# Altium PCB qav90.PcbDoc (part 6 of 7)
Units mm, origin at the board's own origin, x right, y up, seen from the top; angles counter-clockwise.
Board outline 90 x 90 mm, 3 copper layers (Top Layer, Mid-Layer 1, Bottom Layer); 214 components, 77 nets, 727 pads, 256 vias.
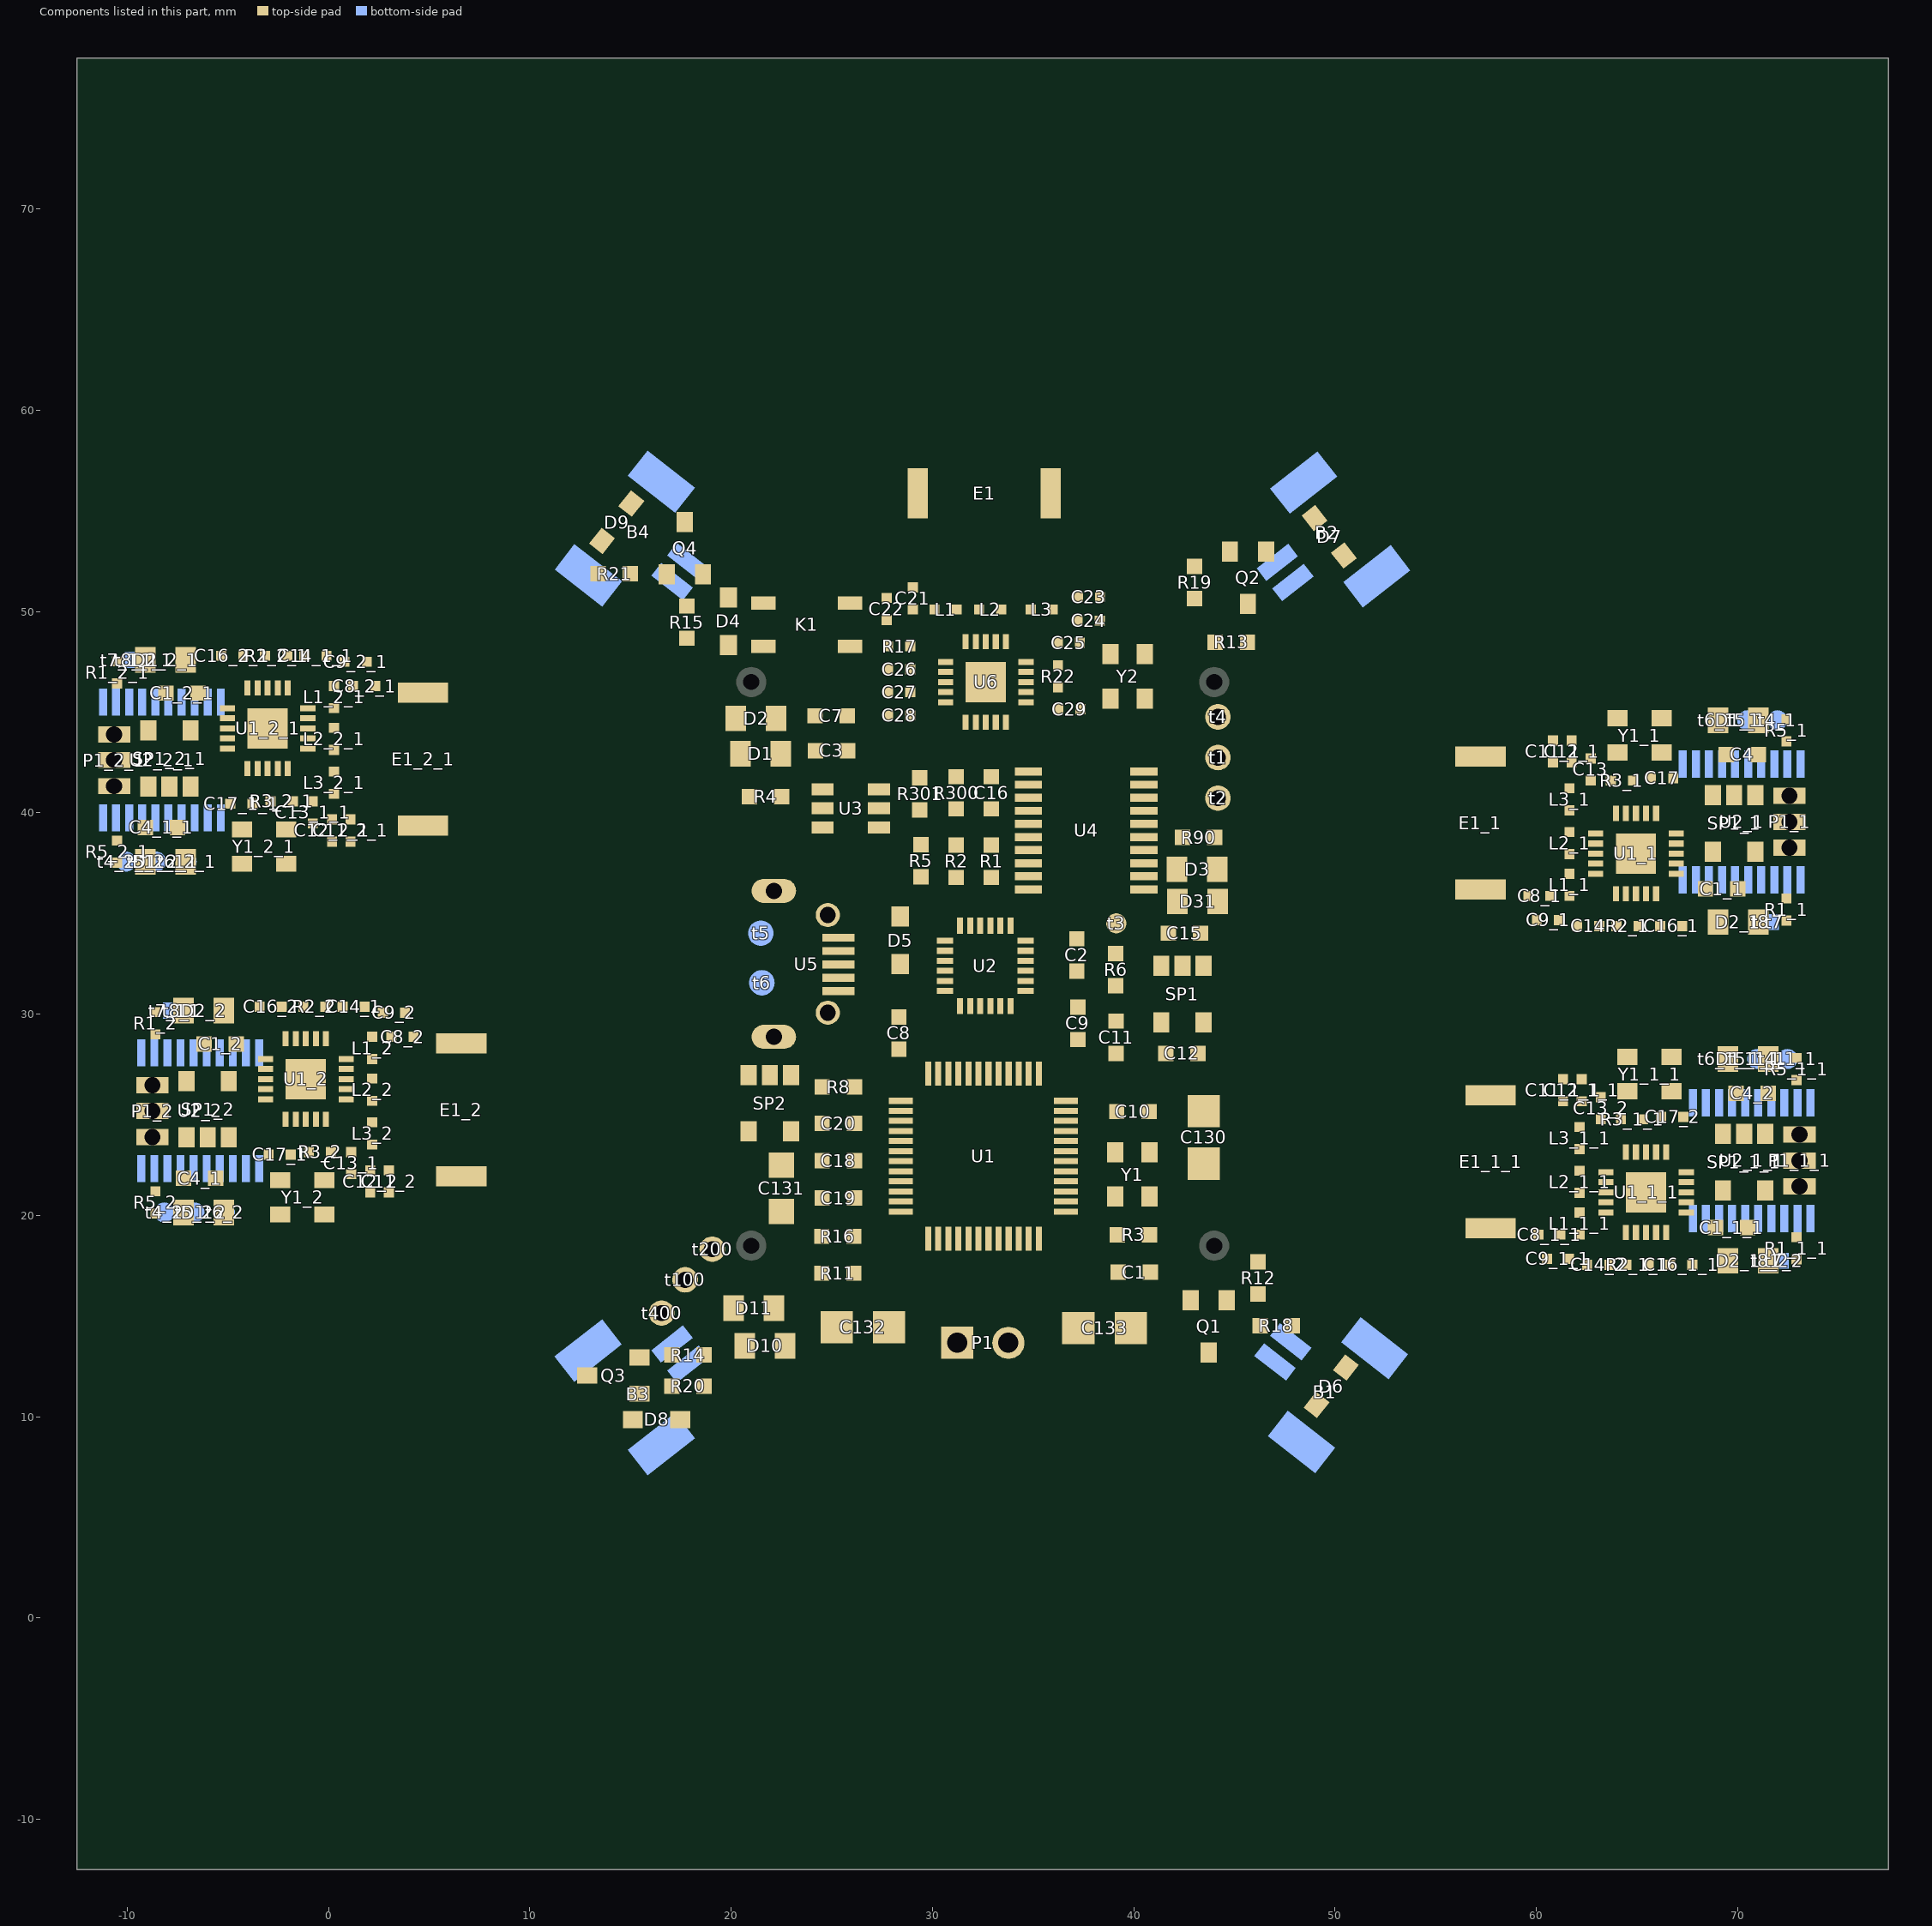
[diagram p6: the components of this part, seen from the top]

## Via types
v1: diameter 0.55, hole 0.25, Top Layer to Bottom Layer, tented both sides, 248 vias
v2: diameter 0.55, hole 0.25, Top Layer to Bottom Layer, 8 vias

## Nets (pads, with @x,y where several pads share a name; then routed paths per layer and width w, separated by ;. In a path a pad name is that pad's centre, name@x,y a point inside that pad or via, vN(x,y) a via of type N, cw(c..) or ccw(c..) an arc to the next point about the centre after c; other vN are vias at no path point) (continued)
copper on no net: (continued)
  Top Layer w0.508: -10.65,41.325 -10.65,38.775 -10.5,38.625 ; -10.5,46.421 -10.029,45.95 -8.25,45.95 ; v1(-9.281,43.173) -9.267,43.187 -8.363,43.187 v1(-7.875,43.675) -7.875,44.55 -6.475,45.95 -6.348,46.077 -6.348,46.581 ; -9.1,39.275 -9.1,39.362 -8.144,40.319 ; v1(-8.95,44.025) -8.95,45.25 -8.25,45.95 ; -8.75,23.9 -8.75,21.35 -8.6,21.2 ; -8.6,28.996 -8.129,28.525 -6.35,28.525 ; -8.075,45.95 -8.25,45.95 ; v1@-7.9,41.225 -8.144,40.981 ; v1(-7.381,25.748) -7.367,25.762 -6.463,25.762 v1(-5.975,26.25) -5.975,27.125 -4.575,28.525 -4.448,28.652 -4.448,29.156 ; -7.2,21.85 -7.2,21.937 -6.244,22.894 ; v1(-7.05,26.6) -7.05,27.825 -6.35,28.525 ; -6.175,28.525 -6.35,28.525 ; v1@-6,23.8 -6.244,23.556 ; v1(-5.375,38.425) -5.206,38.594 -5.206,39.743 -4.875,40.075 ; -4.875,40.45 -4.875,40.075 ; v1(-3.475,21) -3.306,21.169 -3.306,22.318 -2.975,22.65 ; -2.975,23.025 -2.975,22.65 ; -0.775,39.475 0.125,38.575 0.175,38.575 1.1,38.575 ; v1@-0.1,47.8 0.5,47.8 0.8,47.5 ; 0.275,42.05 0.275,43.125 ; 0.275,44.225 0.275,45.2 ; 0.275,46.3 1.225,46.3 ; 1.125,22.05 2.025,21.15 2.075,21.15 3,21.15 ; v1@1.8,30.375 2.4,30.375 2.7,30.075 ; 1.9,47.5 2.325,47.075 ; 2.175,24.625 2.175,25.7 ; 2.175,26.8 2.175,27.775 ; 2.175,28.875 3.125,28.875 ; 3.8,30.075 4.225,29.65 ; 4.75,45.975 4.425,46.3 2.325,46.3 2.325,47.075 ; 6.65,28.55 6.325,28.875 4.225,28.875 4.225,29.65 ; 57.175,36.2 57.5,35.875 59.6,35.875 59.6,35.1 ; 57.675,19.375 58,19.05 60.1,19.05 60.1,18.275 ; 60.025,34.675 59.6,35.1 ; 60.525,17.85 60.1,18.275 ; 60.7,35.875 61.65,35.875 ; 60.825,43.6 61.75,43.6 61.8,43.6 62.7,42.7 ; 61.125,34.675 61.425,34.375 v1@62.025,34.375 ; 61.2,19.05 62.15,19.05 ; 61.325,26.775 62.25,26.775 62.3,26.775 63.2,25.875 ; 61.625,17.85 61.925,17.55 v1@62.525,17.55 ; 61.65,36.975 61.65,37.95 ; 61.65,39.05 61.65,40.125 ; 62.15,20.15 62.15,21.125 ; 62.15,22.225 62.15,23.3 ; 66.8,41.725 66.8,42.1 ; 67.3,24.9 67.3,25.275 ; v1(67.3,43.75) 67.131,43.581 67.131,42.432 66.8,42.1 ; v1(67.8,26.925) 67.631,26.756 67.631,25.607 67.3,25.275 ; v1@69.825,40.95 70.069,41.194 ; 70,36.225 70.175,36.225 ; v1@70.325,24.125 70.569,24.369 ; 70.5,19.4 70.675,19.4 ; v1(70.875,38.15) 70.875,36.925 70.175,36.225 ; 71.025,42.9 71.025,42.813 70.069,41.856 ; v1(71.206,39.002) 71.192,38.988 70.288,38.988 v1(69.8,38.5) 69.8,37.625 68.4,36.225 68.273,36.098 68.273,35.594 ; v1(71.375,21.325) 71.375,20.1 70.675,19.4 ; 71.525,26.075 71.525,25.988 70.569,25.031 ; v1(71.706,22.177) 71.692,22.163 70.788,22.163 v1(70.3,21.675) 70.3,20.8 68.9,19.4 68.773,19.273 68.773,18.769 ; 72.425,35.754 71.954,36.225 70.175,36.225 ; 72.425,43.55 72.575,43.4 72.575,40.85 ; 72.925,18.929 72.454,19.4 70.675,19.4 ; 72.925,26.725 73.075,26.575 73.075,24.025 ; -10.65,38.978 ccw(c-10.148,38.978) -10.503,38.622 ; -10.65,38.978 ccw(c-10.148,38.978) -10.503,38.622 ; -10.65,38.978 ccw(c-10.148,38.978) -10.503,38.622 ; -8.973,39.275 cw(c-8.456,39.275) -8.822,39.641 ; -8.973,39.275 cw(c-8.456,39.275) -8.822,39.641 ; -8.973,39.275 cw(c-8.456,39.275) -8.822,39.641 ; -8.75,21.553 ccw(c-8.248,21.553) -8.603,21.197 ; -8.75,21.553 ccw(c-8.248,21.553) -8.603,21.197 ; -8.75,21.553 ccw(c-8.248,21.553) -8.603,21.197 ; -8.591,45.609 cw(c-8.075,45.094) -8.075,45.823 ; -8.591,45.609 cw(c-8.075,45.094) -8.075,45.823 ; -8.591,45.609 cw(c-8.075,45.094) -8.075,45.823 ; -8.144,40.319 cw(c-7.098,40.319) v1@-7.802,41.092 ; -8.144,40.319 cw(c-7.098,40.319) v1@-7.802,41.092 ; -8.144,40.319 cw(c-7.098,40.319) v1@-7.802,41.092 ; -8.144,40.319 -8.144,40.981 ; -8.144,40.636 cw(c-7.261,40.636) v1@-7.885,41.26 ; -8.144,40.636 cw(c-7.261,40.636) v1@-7.885,41.26 ; -8.144,40.636 cw(c-7.261,40.636) v1@-7.885,41.26 ; -8.144,40.981 cw(c-7.869,40.981) v1@-7.898,41.254 ; -8.144,40.981 cw(c-7.869,40.981) v1@-7.898,41.254 ; -8.144,40.981 cw(c-7.869,40.981) v1@-7.898,41.254 ; -8.059,40.691 ccw(c-8.445,40.939) v1@-8.032,41.137 ; -8.059,40.691 ccw(c-8.445,40.939) v1@-8.032,41.137 ; -8.059,40.691 ccw(c-8.445,40.939) v1@-8.032,41.137 ; -8.011,40.765 ccw(c-8.576,41.128) v1@-7.921,41.271 ; -8.011,40.765 ccw(c-8.576,41.128) v1@-7.921,41.271 ; -8.011,40.765 ccw(c-8.576,41.128) v1@-7.921,41.271 ; -8.011,40.765 ccw(c-8.576,41.128) v1@-7.921,41.271 ; -8.011,40.765 ccw(c-8.576,41.128) v1@-7.921,41.271 ; -8.011,40.765 ccw(c-8.576,41.128) v1@-7.921,41.271 ; -7.073,21.85 cw(c-6.556,21.85) -6.922,22.216 ; -7.073,21.85 cw(c-6.556,21.85) -6.922,22.216 ; -7.073,21.85 cw(c-6.556,21.85) -6.922,22.216 ; -6.691,28.184 cw(c-6.175,27.669) -6.175,28.398 ; -6.691,28.184 cw(c-6.175,27.669) -6.175,28.398 ; -6.691,28.184 cw(c-6.175,27.669) -6.175,28.398 ; -6.565,46.04 ccw(c-7.088,46.563) -6.348,46.563 ; -6.565,46.04 ccw(c-7.088,46.563) -6.348,46.563 ; -6.565,46.04 ccw(c-7.088,46.563) -6.348,46.563 ; -6.376,46.03 cw(c-6.057,46.29) -6.348,46.581 ; -6.376,46.03 cw(c-6.057,46.29) -6.348,46.581 ; -6.376,46.03 cw(c-6.057,46.29) -6.348,46.581 ; -6.348,46.581 -6.186,46.744 -6.186,47.964 v1(-6.1,48.05) -5.575,48.05 -5.325,47.8 ; -6.244,22.894 cw(c-5.198,22.894) v1@-5.902,23.667 ; -6.244,22.894 cw(c-5.198,22.894) v1@-5.902,23.667 ; -6.244,22.894 cw(c-5.198,22.894) v1@-5.902,23.667 ; -6.244,22.894 -6.244,23.556 ; -6.244,23.211 cw(c-5.361,23.211) v1@-5.985,23.835 ; -6.244,23.211 cw(c-5.361,23.211) v1@-5.985,23.835 ; -6.244,23.211 cw(c-5.361,23.211) v1@-5.985,23.835 ; -6.244,23.556 cw(c-5.969,23.556) v1@-5.998,23.829 ; -6.244,23.556 cw(c-5.969,23.556) v1@-5.998,23.829 ; -6.244,23.556 cw(c-5.969,23.556) v1@-5.998,23.829 ; -6.159,23.266 ccw(c-6.545,23.514) v1@-6.132,23.712 ; -6.159,23.266 ccw(c-6.545,23.514) v1@-6.132,23.712 ; -6.159,23.266 ccw(c-6.545,23.514) v1@-6.132,23.712 ; -6.111,23.34 ccw(c-6.676,23.703) v1@-6.021,23.846 ; -6.111,23.34 ccw(c-6.676,23.703) v1@-6.021,23.846 ; -6.111,23.34 ccw(c-6.676,23.703) v1@-6.021,23.846 ; -6.111,23.34 ccw(c-6.676,23.703) v1@-6.021,23.846 ; -6.111,23.34 ccw(c-6.676,23.703) v1@-6.021,23.846 ; -6.111,23.34 ccw(c-6.676,23.703) v1@-6.021,23.846 ; v1@-6.096,48.029 cw(c-5.922,47.203) -5.325,47.8 ; v1@-6.096,48.029 cw(c-5.922,47.203) -5.325,47.8 ; v1@-6.096,48.029 cw(c-5.922,47.203) -5.325,47.8 ; v1@-5.919,48.05 cw(c-5.919,47.206) -5.322,47.803 ; v1@-5.919,48.05 cw(c-5.919,47.206) -5.322,47.803 ; v1@-5.919,48.05 cw(c-5.919,47.206) -5.322,47.803 ; v1@-5.39,38.44 ccw(c-5.833,38.883) -5.206,38.883 ; v1@-5.39,38.44 ccw(c-5.833,38.883) -5.206,38.883 ; v1@-5.39,38.44 ccw(c-5.833,38.883) -5.206,38.883 ; -5.325,47.8 -5.325,47.746 -4.125,46.546 -4.125,45.4 ; -5.134,39.816 ccw(c-5.767,40.45) -4.871,40.45 ; -5.134,39.816 ccw(c-5.767,40.45) -4.871,40.45 ; -5.134,39.816 ccw(c-5.767,40.45) -4.871,40.45 ; -4.875,40.075 ccw(c-5.065,40.265) -4.872,40.453 ; -4.875,40.075 ccw(c-5.065,40.265) -4.872,40.453 ; -4.875,40.075 ccw(c-5.065,40.265) -4.872,40.453 ; -4.665,28.615 ccw(c-5.188,29.138) -4.448,29.138 ; -4.665,28.615 ccw(c-5.188,29.138) -4.448,29.138 ; -4.665,28.615 ccw(c-5.188,29.138) -4.448,29.138 ; -4.476,28.605 cw(c-4.157,28.865) -4.448,29.156 ; -4.476,28.605 cw(c-4.157,28.865) -4.448,29.156 ; -4.476,28.605 cw(c-4.157,28.865) -4.448,29.156 ; -4.448,29.156 -4.286,29.319 -4.286,30.539 v1(-4.2,30.625) -3.675,30.625 -3.425,30.375 ; v1@-4.196,30.604 cw(c-4.022,29.778) -3.425,30.375 ; v1@-4.196,30.604 cw(c-4.022,29.778) -3.425,30.375 ; v1@-4.196,30.604 cw(c-4.022,29.778) -3.425,30.375 ; -4.125,45.4 cw(c-5.031,44.494) -3.763,44.308 ; -4.125,45.4 ccw(c-3.03,46.495) -3.027,44.946 ; -4.125,45.4 cw(c-5.031,44.494) -3.763,44.308 ; -4.125,45.4 ccw(c-3.03,46.495) -3.027,44.946 ; -4.125,45.4 cw(c-5.031,44.494) -3.763,44.308 ; -4.125,45.4 ccw(c-3.03,46.495) -3.027,44.946 ; -4.125,45.4 -3.025,44.3 ; v1@-4.019,30.625 cw(c-4.019,29.781) -3.422,30.378 ; v1@-4.019,30.625 cw(c-4.019,29.781) -3.422,30.378 ; v1@-4.019,30.625 cw(c-4.019,29.781) -3.422,30.378 ; v1@-3.49,21.015 ccw(c-3.933,21.458) -3.306,21.458 ; v1@-3.49,21.015 ccw(c-3.933,21.458) -3.306,21.458 ; v1@-3.49,21.015 ccw(c-3.933,21.458) -3.306,21.458 ; -3.425,30.375 -3.425,30.321 -2.225,29.121 -2.225,27.975 ; v1@-3.333,43.819 ccw(c-3.554,44.3) -3.025,44.3 ; v1@-3.333,43.819 ccw(c-3.554,44.3) -3.025,44.3 ; v1@-3.333,43.819 ccw(c-3.554,44.3) -3.025,44.3 ; v1@-3.332,44.63 cw(c-3.48,44.2) -3.025,44.2 ; v1@-3.332,44.63 cw(c-3.48,44.2) -3.025,44.2 ; v1@-3.332,44.63 cw(c-3.48,44.2) -3.025,44.2 ; v1@-3.329,43.82 ccw(c-3.414,44.2) -3.025,44.2 ; v1@-3.329,43.82 ccw(c-3.414,44.2) -3.025,44.2 ; v1@-3.329,43.82 ccw(c-3.414,44.2) -3.025,44.2 ; v1@-3.327,44.629 cw(c-3.356,44.3) -3.025,44.3 ; v1@-3.327,44.629 cw(c-3.356,44.3) -3.025,44.3 ; v1@-3.327,44.629 cw(c-3.356,44.3) -3.025,44.3 ; -3.234,22.391 ccw(c-3.867,23.025) -2.971,23.025 ; -3.234,22.391 ccw(c-3.867,23.025) -2.971,23.025 ; -3.234,22.391 ccw(c-3.867,23.025) -2.971,23.025 ; -3.025,44.2 -3.025,44.3 ; -2.975,22.65 ccw(c-3.165,22.84) -2.972,23.028 ; -2.975,22.65 ccw(c-3.165,22.84) -2.972,23.028 ; -2.975,22.65 ccw(c-3.165,22.84) -2.972,23.028 ; -2.225,27.975 ccw(c-1.13,29.07) -1.127,27.521 ; -2.225,27.975 cw(c-3.131,27.069) -1.863,26.883 ; -2.225,27.975 ccw(c-1.13,29.07) -1.127,27.521 ; -2.225,27.975 cw(c-3.131,27.069) -1.863,26.883 ; -2.225,27.975 ccw(c-1.13,29.07) -1.127,27.521 ; -2.225,27.975 cw(c-3.131,27.069) -1.863,26.883 ; -2.225,27.975 -1.125,26.875 ; v1@-1.433,26.394 ccw(c-1.654,26.875) -1.125,26.875 ; v1@-1.433,26.394 ccw(c-1.654,26.875) -1.125,26.875 ; v1@-1.433,26.394 ccw(c-1.654,26.875) -1.125,26.875 ; v1@-1.432,27.205 cw(c-1.58,26.775) -1.125,26.775 ; v1@-1.432,27.205 cw(c-1.58,26.775) -1.125,26.775 ; v1@-1.432,27.205 cw(c-1.58,26.775) -1.125,26.775 ; v1@-1.429,26.395 ccw(c-1.514,26.775) -1.125,26.775 ; v1@-1.429,26.395 ccw(c-1.514,26.775) -1.125,26.775 ; v1@-1.429,26.395 ccw(c-1.514,26.775) -1.125,26.775 ; v1@-1.427,27.204 cw(c-1.456,26.875) -1.125,26.875 ; v1@-1.427,27.204 cw(c-1.456,26.875) -1.125,26.875 ; v1@-1.427,27.204 cw(c-1.456,26.875) -1.125,26.875 ; -1.125,26.775 -1.125,26.875 ; -0.748,39.448 cw(c-1.296,38.9) v1@-0.521,38.9 ; -0.748,39.448 cw(c-1.296,38.9) v1@-0.521,38.9 ; -0.748,39.448 cw(c-1.296,38.9) v1@-0.521,38.9 ; v1@-0.5,38.879 cw(c-0.5,38.104) 0.048,38.652 ; v1@-0.5,38.879 cw(c-0.5,38.104) 0.048,38.652 ; v1@-0.5,38.879 cw(c-0.5,38.104) 0.048,38.652 ; v1@-0.115,47.732 cw(c0.086,47.384) 0.19,47.772 ; v1@-0.115,47.732 cw(c0.086,47.384) 0.19,47.772 ; v1@-0.115,47.732 cw(c0.086,47.384) 0.19,47.772 ; v1@-0.115,47.732 cw(c0.086,47.384) 0.19,47.772 ; v1@-0.115,47.732 cw(c0.086,47.384) 0.19,47.772 ; v1@-0.115,47.732 cw(c0.086,47.384) 0.19,47.772 ; v1@0.085,47.8 cw(c0.085,46.785) 0.803,47.503 ; v1@0.085,47.8 cw(c0.085,46.785) 0.803,47.503 ; v1@0.085,47.8 cw(c0.085,46.785) 0.803,47.503 ; 0.376,47.8 cw(c0.376,47.344) 0.804,47.501 ; 0.376,47.8 cw(c0.376,47.344) 0.804,47.501 ; 0.376,47.8 cw(c0.376,47.344) 0.804,47.501 ; 1.152,22.023 cw(c0.604,21.475) v1@1.379,21.475 ; 1.152,22.023 cw(c0.604,21.475) v1@1.379,21.475 ; 1.152,22.023 cw(c0.604,21.475) v1@1.379,21.475 ; v1@1.4,21.454 cw(c1.4,20.679) 1.948,21.227 ; v1@1.4,21.454 cw(c1.4,20.679) 1.948,21.227 ; v1@1.4,21.454 cw(c1.4,20.679) 1.948,21.227 ; v1@1.785,30.307 cw(c1.986,29.959) 2.09,30.347 ; v1@1.785,30.307 cw(c1.986,29.959) 2.09,30.347 ; v1@1.785,30.307 cw(c1.986,29.959) 2.09,30.347 ; v1@1.785,30.307 cw(c1.986,29.959) 2.09,30.347 ; v1@1.785,30.307 cw(c1.986,29.959) 2.09,30.347 ; v1@1.785,30.307 cw(c1.986,29.959) 2.09,30.347 ; 1.9,47.504 cw(c1.896,47.075) 2.325,47.075 ; 1.9,47.504 cw(c1.896,47.075) 2.325,47.075 ; 1.9,47.504 cw(c1.896,47.075) 2.325,47.075 ; 1.903,47.503 cw(c0.884,46.484) 2.325,46.484 ; 1.903,47.503 cw(c0.884,46.484) 2.325,46.484 ; 1.903,47.503 cw(c0.884,46.484) 2.325,46.484 ; v1@1.985,30.375 cw(c1.985,29.36) 2.703,30.078 ; v1@1.985,30.375 cw(c1.985,29.36) 2.703,30.078 ; v1@1.985,30.375 cw(c1.985,29.36) 2.703,30.078 ; 2.276,30.375 cw(c2.276,29.919) 2.704,30.076 ; 2.276,30.375 cw(c2.276,29.919) 2.704,30.076 ; 2.276,30.375 cw(c2.276,29.919) 2.704,30.076 ; 2.621,46.3 cw(c2.621,44.596) 3.826,45.801 ; 2.621,46.3 cw(c2.621,44.596) 3.826,45.801 ; 2.621,46.3 cw(c2.621,44.596) 3.826,45.801 ; 3.181,46.173 ccw(c3.517,46.755) 3.87,46.184 ; 3.181,46.173 ccw(c3.517,46.755) 3.87,46.184 ; 3.181,46.173 ccw(c3.517,46.755) 3.87,46.184 ; 3.8,30.079 cw(c3.796,29.65) 4.225,29.65 ; 3.8,30.079 cw(c3.796,29.65) 4.225,29.65 ; 3.8,30.079 cw(c3.796,29.65) 4.225,29.65 ; 3.803,30.078 cw(c2.784,29.059) 4.225,29.059 ; 3.803,30.078 cw(c2.784,29.059) 4.225,29.059 ; 3.803,30.078 cw(c2.784,29.059) 4.225,29.059 ; 4.521,28.875 cw(c4.521,27.171) 5.726,28.376 ; 4.521,28.875 cw(c4.521,27.171) 5.726,28.376 ; 4.521,28.875 cw(c4.521,27.171) 5.726,28.376 ; 5.081,28.748 ccw(c5.417,29.33) 5.77,28.759 ; 5.081,28.748 ccw(c5.417,29.33) 5.77,28.759 ; 5.081,28.748 ccw(c5.417,29.33) 5.77,28.759 ; 58.055,35.991 cw(c58.408,35.42) 58.744,36.002 ; 58.055,35.991 cw(c58.408,35.42) 58.744,36.002 ; 58.055,35.991 cw(c58.408,35.42) 58.744,36.002 ; 58.099,36.374 ccw(c59.304,37.579) 59.304,35.875 ; 58.099,36.374 ccw(c59.304,37.579) 59.304,35.875 ; 58.099,36.374 ccw(c59.304,37.579) 59.304,35.875 ; 58.555,19.166 cw(c58.908,18.595) 59.244,19.177 ; 58.555,19.166 cw(c58.908,18.595) 59.244,19.177 ; 58.555,19.166 cw(c58.908,18.595) 59.244,19.177 ; 58.599,19.549 ccw(c59.804,20.754) 59.804,19.05 ; 58.599,19.549 ccw(c59.804,20.754) 59.804,19.05 ; 58.599,19.549 ccw(c59.804,20.754) 59.804,19.05 ; 59.6,35.1 ccw(c60.029,35.1) 60.025,34.671 ; 59.6,35.1 ccw(c60.029,35.1) 60.025,34.671 ; 59.6,35.1 ccw(c60.029,35.1) 60.025,34.671 ; 59.6,35.691 ccw(c61.041,35.691) 60.022,34.672 ; 59.6,35.691 ccw(c61.041,35.691) 60.022,34.672 ; 59.6,35.691 ccw(c61.041,35.691) 60.022,34.672 ; 60.1,18.275 ccw(c60.529,18.275) 60.525,17.846 ; 60.1,18.275 ccw(c60.529,18.275) 60.525,17.846 ; 60.1,18.275 ccw(c60.529,18.275) 60.525,17.846 ; 60.1,18.866 ccw(c61.541,18.866) 60.522,17.847 ; 60.1,18.866 ccw(c61.541,18.866) 60.522,17.847 ; 60.1,18.866 ccw(c61.541,18.866) 60.522,17.847 ; 61.121,34.674 ccw(c61.549,34.831) 61.549,34.375 ; 61.121,34.674 ccw(c61.549,34.831) 61.549,34.375 ; 61.121,34.674 ccw(c61.549,34.831) 61.549,34.375 ; 61.122,34.672 ccw(c61.84,35.39) v1@61.84,34.375 ; 61.122,34.672 ccw(c61.84,35.39) v1@61.84,34.375 ; 61.122,34.672 ccw(c61.84,35.39) v1@61.84,34.375 ; 61.622,17.847 ccw(c62.34,18.565) v1@62.34,17.55 ; 61.622,17.847 ccw(c62.34,18.565) v1@62.34,17.55 ; 61.622,17.847 ccw(c62.34,18.565) v1@62.34,17.55 ; 61.621,17.849 ccw(c62.049,18.006) 62.049,17.55 ; 61.621,17.849 ccw(c62.049,18.006) 62.049,17.55 ; 61.621,17.849 ccw(c62.049,18.006) 62.049,17.55 ; 61.735,34.403 ccw(c61.839,34.791) v1@62.04,34.443 ; 61.735,34.403 ccw(c61.839,34.791) v1@62.04,34.443 ; 61.735,34.403 ccw(c61.839,34.791) v1@62.04,34.443 ; 61.735,34.403 ccw(c61.839,34.791) v1@62.04,34.443 ; 61.735,34.403 ccw(c61.839,34.791) v1@62.04,34.443 ; 61.735,34.403 ccw(c61.839,34.791) v1@62.04,34.443 ; 61.877,43.523 ccw(c62.425,44.071) v1@62.425,43.296 ; 61.877,43.523 ccw(c62.425,44.071) v1@62.425,43.296 ; 61.877,43.523 ccw(c62.425,44.071) v1@62.425,43.296 ; 62.235,17.578 ccw(c62.339,17.966) v1@62.54,17.618 ; 62.235,17.578 ccw(c62.339,17.966) v1@62.54,17.618 ; 62.235,17.578 ccw(c62.339,17.966) v1@62.54,17.618 ; 62.235,17.578 ccw(c62.339,17.966) v1@62.54,17.618 ; 62.235,17.578 ccw(c62.339,17.966) v1@62.54,17.618 ; 62.235,17.578 ccw(c62.339,17.966) v1@62.54,17.618 ; 62.377,26.698 ccw(c62.925,27.246) v1@62.925,26.471 ; 62.377,26.698 ccw(c62.925,27.246) v1@62.925,26.471 ; 62.377,26.698 ccw(c62.925,27.246) v1@62.925,26.471 ; v1@62.446,43.275 ccw(c63.221,43.275) 62.673,42.727 ; v1@62.446,43.275 ccw(c63.221,43.275) 62.673,42.727 ; v1@62.446,43.275 ccw(c63.221,43.275) 62.673,42.727 ; v1@62.946,26.45 ccw(c63.721,26.45) 63.173,25.902 ; v1@62.946,26.45 ccw(c63.721,26.45) 63.173,25.902 ; v1@62.946,26.45 ccw(c63.721,26.45) 63.173,25.902 ; 64.95,37.875 ccw(c65.281,37.875) v1@65.252,37.546 ; 64.95,37.875 cw(c65.479,37.875) v1@65.258,38.356 ; 64.95,37.875 ccw(c65.281,37.875) v1@65.252,37.546 ; 64.95,37.875 cw(c65.479,37.875) v1@65.258,38.356 ; 64.95,37.875 ccw(c65.281,37.875) v1@65.252,37.546 ; 64.95,37.875 cw(c65.479,37.875) v1@65.258,38.356 ; 64.95,37.875 64.95,37.975 ; 64.95,37.875 66.05,36.775 ; 64.95,37.975 ccw(c65.405,37.975) v1@65.257,37.545 ; 64.95,37.975 cw(c65.339,37.975) v1@65.254,38.355 ; 64.95,37.975 ccw(c65.405,37.975) v1@65.257,37.545 ; 64.95,37.975 cw(c65.339,37.975) v1@65.254,38.355 ; 64.95,37.975 ccw(c65.405,37.975) v1@65.257,37.545 ; 64.95,37.975 cw(c65.339,37.975) v1@65.254,38.355 ; 64.952,37.229 cw(c64.955,35.68) 66.05,36.775 ; 64.952,37.229 cw(c64.955,35.68) 66.05,36.775 ; 64.952,37.229 cw(c64.955,35.68) 66.05,36.775 ; 65.45,21.05 cw(c65.979,21.05) v1@65.758,21.531 ; 65.45,21.05 ccw(c65.781,21.05) v1@65.752,20.721 ; 65.45,21.05 cw(c65.979,21.05) v1@65.758,21.531 ; 65.45,21.05 ccw(c65.781,21.05) v1@65.752,20.721 ; 65.45,21.05 cw(c65.979,21.05) v1@65.758,21.531 ; 65.45,21.05 ccw(c65.781,21.05) v1@65.752,20.721 ; 65.45,21.05 66.55,19.95 ; 65.45,21.05 65.45,21.15 ; 65.45,21.15 cw(c65.839,21.15) v1@65.754,21.53 ; 65.45,21.15 ccw(c65.905,21.15) v1@65.757,20.72 ; 65.45,21.15 cw(c65.839,21.15) v1@65.754,21.53 ; 65.45,21.15 ccw(c65.905,21.15) v1@65.757,20.72 ; 65.45,21.15 cw(c65.839,21.15) v1@65.754,21.53 ; 65.45,21.15 ccw(c65.905,21.15) v1@65.757,20.72 ; 65.452,20.404 cw(c65.455,18.855) 66.55,19.95 ; 65.452,20.404 cw(c65.455,18.855) 66.55,19.95 ; 65.452,20.404 cw(c65.455,18.855) 66.55,19.95 ; 65.688,37.867 ccw(c66.956,37.681) 66.05,36.775 ; 65.688,37.867 ccw(c66.956,37.681) 66.05,36.775 ; 65.688,37.867 ccw(c66.956,37.681) 66.05,36.775 ; 66.05,36.775 66.05,35.629 67.25,34.429 67.25,34.375 ; 66.188,21.042 ccw(c67.456,20.856) 66.55,19.95 ; 66.188,21.042 ccw(c67.456,20.856) 66.55,19.95 ; 66.188,21.042 ccw(c67.456,20.856) 66.55,19.95 ; 66.55,19.95 66.55,18.804 67.75,17.604 67.75,17.55 ; 66.796,41.725 cw(c67.692,41.725) 67.059,42.359 ; 66.796,41.725 cw(c67.692,41.725) 67.059,42.359 ; 66.796,41.725 cw(c67.692,41.725) 67.059,42.359 ; 66.797,41.722 cw(c66.99,41.91) 66.8,42.1 ; 66.797,41.722 cw(c66.99,41.91) 66.8,42.1 ; 66.797,41.722 cw(c66.99,41.91) 66.8,42.1 ; 67.131,43.292 cw(c67.758,43.292) v1@67.315,43.735 ; 67.131,43.292 cw(c67.758,43.292) v1@67.315,43.735 ; 67.131,43.292 cw(c67.758,43.292) v1@67.315,43.735 ; 67.247,34.372 ccw(c67.844,34.969) v1@67.844,34.125 ; 67.247,34.372 ccw(c67.844,34.969) v1@67.844,34.125 ; 67.247,34.372 ccw(c67.844,34.969) v1@67.844,34.125 ; 67.25,34.375 ccw(c67.847,34.972) v1@68.021,34.146 ; 67.25,34.375 ccw(c67.847,34.972) v1@68.021,34.146 ; 67.25,34.375 ccw(c67.847,34.972) v1@68.021,34.146 ; 67.25,34.375 67.5,34.125 v1(68.025,34.125) 68.111,34.211 68.111,35.431 68.273,35.594 ; 67.296,24.9 cw(c68.192,24.9) 67.559,25.534 ; 67.296,24.9 cw(c68.192,24.9) 67.559,25.534 ; 67.296,24.9 cw(c68.192,24.9) 67.559,25.534 ; 67.297,24.897 cw(c67.49,25.085) 67.3,25.275 ; 67.297,24.897 cw(c67.49,25.085) 67.3,25.275 ; 67.297,24.897 cw(c67.49,25.085) 67.3,25.275 ; 67.631,26.467 cw(c68.258,26.467) v1@67.815,26.91 ; 67.631,26.467 cw(c68.258,26.467) v1@67.815,26.91 ; 67.631,26.467 cw(c68.258,26.467) v1@67.815,26.91 ; 67.747,17.547 ccw(c68.344,18.144) v1@68.344,17.3 ; 67.747,17.547 ccw(c68.344,18.144) v1@68.344,17.3 ; 67.747,17.547 ccw(c68.344,18.144) v1@68.344,17.3 ; 67.75,17.55 ccw(c68.347,18.147) v1@68.521,17.321 ; 67.75,17.55 ccw(c68.347,18.147) v1@68.521,17.321 ; 67.75,17.55 ccw(c68.347,18.147) v1@68.521,17.321 ; 67.75,17.55 68,17.3 v1(68.525,17.3) 68.611,17.386 68.611,18.606 68.773,18.769 ; 68.273,35.594 ccw(c67.982,35.885) 68.301,36.145 ; 68.273,35.594 ccw(c67.982,35.885) 68.301,36.145 ; 68.273,35.594 ccw(c67.982,35.885) 68.301,36.145 ; 68.273,35.612 cw(c69.013,35.612) 68.49,36.135 ; 68.273,35.612 cw(c69.013,35.612) 68.49,36.135 ; 68.273,35.612 cw(c69.013,35.612) 68.49,36.135 ; 68.773,18.769 ccw(c68.482,19.06) 68.801,19.32 ; 68.773,18.769 ccw(c68.482,19.06) 68.801,19.32 ; 68.773,18.769 ccw(c68.482,19.06) 68.801,19.32 ; 68.773,18.787 cw(c69.513,18.787) 68.99,19.31 ; 68.773,18.787 cw(c69.513,18.787) 68.99,19.31 ; 68.773,18.787 cw(c69.513,18.787) 68.99,19.31 ; v1@69.727,41.083 ccw(c69.023,41.856) 70.069,41.856 ; v1@69.727,41.083 ccw(c69.023,41.856) 70.069,41.856 ; v1@69.727,41.083 ccw(c69.023,41.856) 70.069,41.856 ; v1@69.81,40.915 ccw(c69.186,41.539) 70.069,41.539 ; v1@69.81,40.915 ccw(c69.186,41.539) 70.069,41.539 ; v1@69.81,40.915 ccw(c69.186,41.539) 70.069,41.539 ; v1@69.823,40.921 ccw(c69.794,41.194) 70.069,41.194 ; v1@69.823,40.921 ccw(c69.794,41.194) 70.069,41.194 ; v1@69.823,40.921 ccw(c69.794,41.194) 70.069,41.194 ; v1@69.846,40.904 cw(c70.501,41.047) 69.936,41.41 ; v1@69.846,40.904 cw(c70.501,41.047) 69.936,41.41 ; v1@69.846,40.904 cw(c70.501,41.047) 69.936,41.41 ; v1@69.846,40.904 cw(c70.501,41.047) 69.936,41.41 ; v1@69.846,40.904 cw(c70.501,41.047) 69.936,41.41 ; v1@69.846,40.904 cw(c70.501,41.047) 69.936,41.41 ; v1@69.957,41.038 cw(c70.37,41.236) 69.984,41.484 ; v1@69.957,41.038 cw(c70.37,41.236) 69.984,41.484 ; v1@69.957,41.038 cw(c70.37,41.236) 69.984,41.484 ; 70,36.352 ccw(c70,37.081) 70.516,36.566 ; 70,36.352 ccw(c70,37.081) 70.516,36.566 ; 70,36.352 ccw(c70,37.081) 70.516,36.566 ; 70.069,41.194 70.069,41.856 ; v1@70.227,24.258 ccw(c69.523,25.031) 70.569,25.031 ; v1@70.227,24.258 ccw(c69.523,25.031) 70.569,25.031 ; v1@70.227,24.258 ccw(c69.523,25.031) 70.569,25.031 ; v1@70.31,24.09 ccw(c69.686,24.714) 70.569,24.714 ; v1@70.31,24.09 ccw(c69.686,24.714) 70.569,24.714 ; v1@70.31,24.09 ccw(c69.686,24.714) 70.569,24.714 ; v1@70.323,24.096 ccw(c70.294,24.369) 70.569,24.369 ; v1@70.323,24.096 ccw(c70.294,24.369) 70.569,24.369 ; v1@70.323,24.096 ccw(c70.294,24.369) 70.569,24.369 ; v1@70.346,24.079 cw(c71.001,24.222) 70.436,24.585 ; v1@70.346,24.079 cw(c71.001,24.222) 70.436,24.585 ; v1@70.346,24.079 cw(c71.001,24.222) 70.436,24.585 ; v1@70.346,24.079 cw(c71.001,24.222) 70.436,24.585 ; v1@70.346,24.079 cw(c71.001,24.222) 70.436,24.585 ; v1@70.346,24.079 cw(c71.001,24.222) 70.436,24.585 ; v1@70.457,24.213 cw(c70.87,24.411) 70.484,24.659 ; v1@70.457,24.213 cw(c70.87,24.411) 70.484,24.659 ; v1@70.457,24.213 cw(c70.87,24.411) 70.484,24.659 ; 70.5,19.527 ccw(c70.5,20.256) 71.016,19.741 ; 70.5,19.527 ccw(c70.5,20.256) 71.016,19.741 ; 70.5,19.527 ccw(c70.5,20.256) 71.016,19.741 ; 70.569,24.369 70.569,25.031 ; 70.747,42.534 ccw(c70.381,42.9) 70.898,42.9 ; 70.747,42.534 ccw(c70.381,42.9) 70.898,42.9 ; 70.747,42.534 ccw(c70.381,42.9) 70.898,42.9 ; 71.247,25.709 ccw(c70.881,26.075) 71.398,26.075 ; 71.247,25.709 ccw(c70.881,26.075) 71.398,26.075 ; 71.247,25.709 ccw(c70.881,26.075) 71.398,26.075 ; 72.428,43.553 cw(c72.073,43.197) 72.575,43.197 ; 72.428,43.553 cw(c72.073,43.197) 72.575,43.197 ; 72.428,43.553 cw(c72.073,43.197) 72.575,43.197 ; 72.928,26.728 cw(c72.573,26.372) 73.075,26.372 ; 72.928,26.728 cw(c72.573,26.372) 73.075,26.372 ; 72.928,26.728 cw(c72.573,26.372) 73.075,26.372
  Top Layer w0.762: -10.55,41.325 -10.45,41.225 -8.95,41.225 -8.95,42.05 -8.6,42.4 ; -8.65,23.9 -8.55,23.8 -7.05,23.8 -7.05,24.625 -6.7,24.975 ; -1.2,47.075 -1.2,47.8 ; -1,45.45 v1@-1,46.875 ; 0.7,29.65 0.7,30.375 ; 0.9,28.025 v1@0.9,29.45 ; v1@62.925,35.3 62.925,36.725 ; 63.125,34.375 63.125,35.1 ; v1@63.425,18.475 63.425,19.9 ; 63.625,17.55 63.625,18.275 ; 72.475,40.85 72.375,40.95 70.875,40.95 70.875,40.125 70.525,39.775 ; 72.975,24.025 72.875,24.125 71.375,24.125 71.375,23.3 71.025,22.95 ; -8.931,41.403 cw(c-7.771,41.571) -8.6,42.4 ; -8.931,41.403 cw(c-7.771,41.571) -8.6,42.4 ; -8.931,41.403 cw(c-7.771,41.571) -8.6,42.4 ; -8.6,42.4 -7.075,42.4 -6.85,42.175 -6.85,39.925 -7.5,39.275 ; -7.5,39.275 ccw(c-9.069,40.844) -6.85,40.844 ; -7.5,39.275 ccw(c-9.069,40.844) -6.85,40.844 ; -7.5,39.275 ccw(c-9.069,40.844) -6.85,40.844 ; -7.031,23.978 cw(c-5.871,24.146) -6.7,24.975 ; -7.031,23.978 cw(c-5.871,24.146) -6.7,24.975 ; -7.031,23.978 cw(c-5.871,24.146) -6.7,24.975 ; -6.7,24.975 -5.175,24.975 -4.95,24.75 -4.95,22.5 -5.6,21.85 ; -5.6,21.85 ccw(c-7.169,23.419) -4.95,23.419 ; -5.6,21.85 ccw(c-7.169,23.419) -4.95,23.419 ; -5.6,21.85 ccw(c-7.169,23.419) -4.95,23.419 ; -1.2,47.283 ccw(c-0.517,47.283) v1@-1,46.8 ; -1.2,47.283 ccw(c-0.517,47.283) v1@-1,46.8 ; -1.2,47.283 ccw(c-0.517,47.283) v1@-1,46.8 ; 0.7,29.858 ccw(c1.383,29.858) v1@0.9,29.375 ; 0.7,29.858 ccw(c1.383,29.858) v1@0.9,29.375 ; 0.7,29.858 ccw(c1.383,29.858) v1@0.9,29.375 ; v1@62.925,35.375 cw(c62.442,34.892) 63.125,34.892 ; v1@62.925,35.375 cw(c62.442,34.892) 63.125,34.892 ; v1@62.925,35.375 cw(c62.442,34.892) 63.125,34.892 ; v1@63.425,18.55 cw(c62.942,18.067) 63.625,18.067 ; v1@63.425,18.55 cw(c62.942,18.067) 63.625,18.067 ; v1@63.425,18.55 cw(c62.942,18.067) 63.625,18.067 ; 68.775,41.331 cw(c70.994,41.331) 69.425,42.9 ; 68.775,41.331 cw(c70.994,41.331) 69.425,42.9 ; 68.775,41.331 cw(c70.994,41.331) 69.425,42.9 ; 69.275,24.506 cw(c71.494,24.506) 69.925,26.075 ; 69.275,24.506 cw(c71.494,24.506) 69.925,26.075 ; 69.275,24.506 cw(c71.494,24.506) 69.925,26.075 ; 69.425,42.9 68.775,42.25 68.775,40 69,39.775 70.525,39.775 ; 69.925,26.075 69.275,25.425 69.275,23.175 69.5,22.95 71.025,22.95 ; 70.525,39.775 ccw(c69.696,40.604) 70.856,40.772 ; 70.525,39.775 ccw(c69.696,40.604) 70.856,40.772 ; 70.525,39.775 ccw(c69.696,40.604) 70.856,40.772 ; 71.025,22.95 ccw(c70.196,23.779) 71.356,23.947 ; 71.025,22.95 ccw(c70.196,23.779) 71.356,23.947 ; 71.025,22.95 ccw(c70.196,23.779) 71.356,23.947
  Bottom Layer w0.254: -11.2,39.75 -11.12,39.67 -11.12,37.945 -10.75,37.575 ; v1@-11.134,46.896 -10.796,46.896 ; -10.55,39.75 -10.55,38.6 -10.304,38.354 -9.329,38.354 -8.55,37.575 ; -10.55,45.5 -10.55,46.65 ; -10.05,37.575 -10.75,37.575 ; -9.9,45.5 -9.9,47.575 -9.875,47.6 ; -9.3,22.325 -9.22,22.245 -9.22,20.52 -8.85,20.15 ; v1@-9.234,29.471 -8.896,29.471 ; -8.65,22.325 -8.65,21.175 -8.404,20.929 -7.429,20.929 -6.65,20.15 ; -8.65,28.075 -8.65,29.225 ; -8.15,20.15 -8.85,20.15 ; -8,28.075 -8,30.15 -7.975,30.175 ; -7.3,39.75 -7.3,38.65 -7.05,38.4 -6.175,38.4 -5.95,38.175 v1@-5.95,37.175 ; -7.3,45.5 -7.3,43.675 -6.6,42.975 -5.125,42.975 -4.558,42.408 -4.558,41.308 v1(-4.5,41.25) ; -6.65,39.75 -6.65,41.775 -6.1,42.325 v1(-5.575,42.325) ; -6,45.5 -6,46.175 v1@-5.463,46.712 ; -5.931,45.997 cw(c-5.749,46.056) -5.884,46.191 ; v1@-5.875,41.425 -5.35,40.9 -5.35,39.75 ; -5.4,22.325 -5.4,21.225 -5.15,20.975 -4.275,20.975 -4.05,20.75 v1@-4.05,19.75 ; -5.4,28.075 -5.4,26.25 -4.7,25.55 -3.225,25.55 -2.658,24.983 -2.658,23.883 v1(-2.6,23.825) ; -5.4,45.55 -5.4,45.675 v1(-4.925,46.15) ; -4.75,22.325 -4.75,24.35 -4.2,24.9 v1(-3.675,24.9) ; -4.1,28.075 -4.1,28.75 v1@-3.563,29.287 ; -4.031,28.572 cw(c-3.849,28.631) -3.984,28.766 ; v1@-3.975,24 -3.45,23.475 -3.45,22.325 ; -3.5,28.125 -3.5,28.25 v1(-3.025,28.725) ; v1@-0.15,47.775 v1(-0.125,47.75) ; v1@1.75,30.35 v1(1.775,30.325) ; v1(62.05,34.425) v1@62.075,34.4 ; v1(62.55,17.6) v1@62.575,17.575 ; v1(66.425,40.925) 66.483,40.867 66.483,39.767 67.05,39.2 68.525,39.2 69.225,38.5 69.225,36.675 ; v1(66.925,24.1) 66.983,24.042 66.983,22.942 67.55,22.375 69.025,22.375 69.725,21.675 69.725,19.85 ; 67.275,42.425 67.275,41.275 v1@67.8,40.75 ; 67.325,36.625 67.325,36.5 v1(66.85,36.025) ; v1@67.388,35.463 67.925,36 67.925,36.675 ; v1(67.5,39.85) 68.025,39.85 68.575,40.4 68.575,42.425 ; 67.775,25.6 67.775,24.45 v1@68.3,23.925 ; 67.809,35.984 ccw(c67.674,36.119) 67.856,36.178 ; 67.825,19.8 67.825,19.675 v1(67.35,19.2) ; v1@67.875,45 67.875,44 68.1,43.775 68.975,43.775 69.225,43.525 69.225,42.425 ; v1@67.888,18.638 68.425,19.175 68.425,19.85 ; v1(68,23.025) 68.525,23.025 69.075,23.575 69.075,25.6 ; 68.309,19.159 ccw(c68.174,19.294) 68.356,19.353 ; v1@68.375,28.175 68.375,27.175 68.6,26.95 69.475,26.95 69.725,26.7 69.725,25.6 ; 70.475,44.6 71.254,43.821 72.229,43.821 72.475,43.575 72.475,42.425 ; 70.975,27.775 71.754,26.996 72.729,26.996 72.975,26.75 72.975,25.6 ; 71.8,34.575 71.825,34.6 71.825,36.675 ; 71.975,44.6 72.675,44.6 ; 72.3,17.75 72.325,17.775 72.325,19.85 ; 72.475,27.775 73.175,27.775 ; 72.475,36.675 72.475,35.525 ; 72.975,19.85 72.975,18.7 ; v1@73.059,35.279 72.721,35.279 ; 73.125,42.425 73.045,42.505 73.045,44.23 72.675,44.6 ; v1@73.559,18.454 73.221,18.454 ; 73.625,25.6 73.545,25.68 73.545,27.405 73.175,27.775 ; -11.252,39.223 cw(c-11.57,38.905) -11.12,38.905 ; -11.252,39.223 cw(c-11.57,38.905) -11.12,38.905 ; -11.252,39.223 cw(c-11.57,38.905) -11.12,38.905 ; v1@-11.176,47.053 cw(c-11.097,46.738) -10.867,46.967 ; v1@-11.176,47.053 cw(c-11.097,46.738) -10.867,46.967 ; v1@-11.176,47.053 cw(c-11.097,46.738) -10.867,46.967 ; -11.156,39.057 cw(c-11.022,39.134) -11.143,39.23 ; -11.156,39.057 cw(c-11.022,39.134) -11.143,39.23 ; -11.156,39.057 cw(c-11.022,39.134) -11.143,39.23 ; v1@-11.114,46.806 cw(c-10.97,46.23) -10.55,46.65 ; v1@-11.114,46.806 cw(c-10.97,46.23) -10.55,46.65 ; v1@-11.114,46.806 cw(c-10.97,46.23) -10.55,46.65 ; v1@-11.023,47.025 ccw(c-10.796,47.159) -10.796,46.896 ; v1@-11.023,47.025 ccw(c-10.796,47.159) -10.796,46.896 ; v1@-11.023,47.025 ccw(c-10.796,47.159) -10.796,46.896 ; -10.796,46.896 -10.55,46.65 ; -10.75,37.575 cw(c-10.75,37.105) -10.36,37.367 ; -10.75,37.575 ccw(c-10.75,38.045) -10.36,37.783 ; -10.75,37.575 cw(c-10.75,37.105) -10.36,37.367 ; -10.75,37.575 ccw(c-10.75,38.045) -10.36,37.783 ; -10.75,37.575 cw(c-10.75,37.105) -10.36,37.367 ; -10.75,37.575 ccw(c-10.75,38.045) -10.36,37.783 ; -9.9,47.093 cw(c-9.518,47.093) -9.788,47.363 ; -9.9,47.093 cw(c-9.518,47.093) -9.788,47.363 ; -9.9,47.093 cw(c-9.518,47.093) -9.788,47.363 ; -9.352,21.798 cw(c-9.67,21.48) -9.22,21.48 ; -9.352,21.798 cw(c-9.67,21.48) -9.22,21.48 ; -9.352,21.798 cw(c-9.67,21.48) -9.22,21.48 ; v1@-9.276,29.628 cw(c-9.197,29.313) -8.967,29.542 ; v1@-9.276,29.628 cw(c-9.197,29.313) -8.967,29.542 ; v1@-9.276,29.628 cw(c-9.197,29.313) -8.967,29.542 ; -9.256,21.632 cw(c-9.122,21.709) -9.243,21.805 ; -9.256,21.632 cw(c-9.122,21.709) -9.243,21.805 ; -9.256,21.632 cw(c-9.122,21.709) -9.243,21.805 ; v1@-9.214,29.381 cw(c-9.07,28.805) -8.65,29.225 ; v1@-9.214,29.381 cw(c-9.07,28.805) -8.65,29.225 ; v1@-9.214,29.381 cw(c-9.07,28.805) -8.65,29.225 ; -9.187,38.212 cw(c-9.823,37.575) -8.923,37.575 ; -9.187,38.212 ccw(c-8.55,38.848) -8.55,37.948 ; -9.187,38.212 cw(c-9.823,37.575) -8.923,37.575 ; -9.187,38.212 ccw(c-8.55,38.848) -8.55,37.948 ; -9.187,38.212 cw(c-9.823,37.575) -8.923,37.575 ; -9.187,38.212 ccw(c-8.55,38.848) -8.55,37.948 ; v1@-9.123,29.6 ccw(c-8.896,29.734) -8.896,29.471 ; v1@-9.123,29.6 ccw(c-8.896,29.734) -8.896,29.471 ; v1@-9.123,29.6 ccw(c-8.896,29.734) -8.896,29.471 ; -8.896,29.471 -8.65,29.225 ; -8.85,20.15 ccw(c-8.85,20.62) -8.46,20.358 ; -8.85,20.15 cw(c-8.85,19.68) -8.46,19.942 ; -8.85,20.15 ccw(c-8.85,20.62) -8.46,20.358 ; -8.85,20.15 cw(c-8.85,19.68) -8.46,19.942 ; -8.85,20.15 ccw(c-8.85,20.62) -8.46,20.358 ; -8.85,20.15 cw(c-8.85,19.68) -8.46,19.942 ; -8,29.668 cw(c-7.618,29.668) -7.888,29.938 ; -8,29.668 cw(c-7.618,29.668) -7.888,29.938 ; -8,29.668 cw(c-7.618,29.668) -7.888,29.938 ; -7.287,20.787 ccw(c-6.65,21.423) -6.65,20.523 ; -7.287,20.787 cw(c-7.923,20.15) -7.023,20.15 ; -7.287,20.787 ccw(c-6.65,21.423) -6.65,20.523 ; -7.287,20.787 cw(c-7.923,20.15) -7.023,20.15 ; -7.287,20.787 ccw(c-6.65,21.423) -6.65,20.523 ; -7.287,20.787 cw(c-7.923,20.15) -7.023,20.15 ; v1@-6.055,37.28 ccw(c-6.307,37.532) -5.95,37.532 ; v1@-6.055,37.28 ccw(c-6.307,37.532) -5.95,37.532 ; v1@-6.055,37.28 ccw(c-6.307,37.532) -5.95,37.532 ; -6.037,46.038 ccw(c-6.245,46.399) -5.842,46.291 ; -6.037,46.038 ccw(c-6.245,46.399) -5.842,46.291 ; -6.037,46.038 ccw(c-6.245,46.399) -5.842,46.291 ; -5.95,37.532 ccw(c-5.593,37.532) v1@-5.845,37.28 ; -5.95,37.532 ccw(c-5.593,37.532) v1@-5.845,37.28 ; -5.95,37.532 ccw(c-5.593,37.532) v1@-5.845,37.28 ; -5.932,42.325 cw(c-5.932,41.968) v1@-5.68,42.22 ; -5.932,42.325 ccw(c-5.932,42.682) v1@-5.68,42.43 ; -5.932,42.325 cw(c-5.932,41.968) v1@-5.68,42.22 ; -5.932,42.325 ccw(c-5.932,42.682) v1@-5.68,42.43 ; -5.932,42.325 cw(c-5.932,41.968) v1@-5.68,42.22 ; -5.932,42.325 ccw(c-5.932,42.682) v1@-5.68,42.43 ; -5.927,45.975 cw(c-5.268,45.975) -5.734,46.441 ; -5.927,45.975 cw(c-5.268,45.975) -5.734,46.441 ; -5.927,45.975 cw(c-5.268,45.975) -5.734,46.441 ; v1@-5.777,41.525 ccw(c-5.299,41.525) -5.637,41.187 ; v1@-5.777,41.525 ccw(c-5.299,41.525) -5.637,41.187 ; v1@-5.777,41.525 ccw(c-5.299,41.525) -5.637,41.187 ; -5.745,46.43 ccw(c-6.041,46.725) v1@-5.623,46.725 ; -5.745,46.43 ccw(c-6.041,46.725) v1@-5.623,46.725 ; -5.745,46.43 ccw(c-6.041,46.725) v1@-5.623,46.725 ; -5.685,46.49 cw(c-5.475,46.28) v1@-5.475,46.577 ; -5.685,46.49 cw(c-5.475,46.28) v1@-5.475,46.577 ; -5.685,46.49 cw(c-5.475,46.28) v1@-5.475,46.577 ; -5.33,46.045 ccw(c-5.216,46.441) v1@-4.925,46.15 ; -5.33,46.045 ccw(c-5.216,46.441) v1@-4.925,46.15 ; -5.33,46.045 ccw(c-5.216,46.441) v1@-4.925,46.15 ; -5.325,46.044 ccw(c-5.243,46.274) v1@-5.031,46.152 ; -5.325,46.044 ccw(c-5.243,46.274) v1@-5.031,46.152 ; -5.325,46.044 ccw(c-5.243,46.274) v1@-5.031,46.152 ; -5.299,45.923 cw(c-5.009,45.623) v1@-5.002,46.04 ; -5.299,45.923 cw(c-5.009,45.623) v1@-5.002,46.04 ; -5.299,45.923 cw(c-5.009,45.623) v1@-5.002,46.04 ; -5.178,45.897 cw(c-4.925,45.645) v1@-4.925,46.002 ; -5.178,45.897 ccw(c-5.43,46.15) v1@-5.073,46.15 ; -5.178,45.897 cw(c-4.925,45.645) v1@-4.925,46.002 ; -5.178,45.897 ccw(c-5.43,46.15) v1@-5.073,46.15 ; -5.178,45.897 cw(c-4.925,45.645) v1@-4.925,46.002 ; -5.178,45.897 ccw(c-5.43,46.15) v1@-5.073,46.15 ; -4.558,41.749 ccw(c-4.001,41.749) v1@-4.395,41.354 ; -4.558,41.749 ccw(c-4.001,41.749) v1@-4.395,41.354 ; -4.558,41.749 ccw(c-4.001,41.749) v1@-4.395,41.354 ; v1@-4.155,19.855 ccw(c-4.407,20.107) -4.05,20.107 ; v1@-4.155,19.855 ccw(c-4.407,20.107) -4.05,20.107 ; v1@-4.155,19.855 ccw(c-4.407,20.107) -4.05,20.107 ; -4.137,28.613 ccw(c-4.345,28.974) -3.942,28.866 ; -4.137,28.613 ccw(c-4.345,28.974) -3.942,28.866 ; -4.137,28.613 ccw(c-4.345,28.974) -3.942,28.866 ; -4.05,20.107 ccw(c-3.693,20.107) v1@-3.945,19.855 ; -4.05,20.107 ccw(c-3.693,20.107) v1@-3.945,19.855 ; -4.05,20.107 ccw(c-3.693,20.107) v1@-3.945,19.855 ; -4.032,24.9 ccw(c-4.032,25.257) v1@-3.78,25.005 ; -4.032,24.9 cw(c-4.032,24.543) v1@-3.78,24.795 ; -4.032,24.9 ccw(c-4.032,25.257) v1@-3.78,25.005 ; -4.032,24.9 cw(c-4.032,24.543) v1@-3.78,24.795 ; -4.032,24.9 ccw(c-4.032,25.257) v1@-3.78,25.005 ; -4.032,24.9 cw(c-4.032,24.543) v1@-3.78,24.795 ; -4.027,28.55 cw(c-3.368,28.55) -3.834,29.016 ; -4.027,28.55 cw(c-3.368,28.55) -3.834,29.016 ; -4.027,28.55 cw(c-3.368,28.55) -3.834,29.016 ; v1@-3.877,24.1 ccw(c-3.399,24.1) -3.737,23.762 ; v1@-3.877,24.1 ccw(c-3.399,24.1) -3.737,23.762 ; v1@-3.877,24.1 ccw(c-3.399,24.1) -3.737,23.762 ; -3.845,29.005 ccw(c-4.141,29.3) v1@-3.723,29.3 ; -3.845,29.005 ccw(c-4.141,29.3) v1@-3.723,29.3 ; -3.845,29.005 ccw(c-4.141,29.3) v1@-3.723,29.3 ; -3.785,29.065 cw(c-3.575,28.855) v1@-3.575,29.152 ; -3.785,29.065 cw(c-3.575,28.855) v1@-3.575,29.152 ; -3.785,29.065 cw(c-3.575,28.855) v1@-3.575,29.152 ; -3.43,28.62 ccw(c-3.316,29.016) v1(-3.025,28.725) ; -3.43,28.62 ccw(c-3.316,29.016) v1(-3.025,28.725) ; -3.43,28.62 ccw(c-3.316,29.016) v1(-3.025,28.725) ; -3.425,28.619 ccw(c-3.343,28.849) v1@-3.131,28.727 ; -3.425,28.619 ccw(c-3.343,28.849) v1@-3.131,28.727 ; -3.425,28.619 ccw(c-3.343,28.849) v1@-3.131,28.727 ; -3.399,28.498 cw(c-3.109,28.198) v1@-3.102,28.615 ; -3.399,28.498 cw(c-3.109,28.198) v1@-3.102,28.615 ; -3.399,28.498 cw(c-3.109,28.198) v1@-3.102,28.615 ; -3.278,28.472 ccw(c-3.53,28.725) v1@-3.173,28.725 ; -3.278,28.472 cw(c-3.025,28.22) v1@-3.025,28.577 ; -3.278,28.472 ccw(c-3.53,28.725) v1@-3.173,28.725 ; -3.278,28.472 cw(c-3.025,28.22) v1@-3.025,28.577 ; -3.278,28.472 ccw(c-3.53,28.725) v1@-3.173,28.725 ; -3.278,28.472 cw(c-3.025,28.22) v1@-3.025,28.577 ; -2.658,24.324 ccw(c-2.101,24.324) v1@-2.495,23.929 ; -2.658,24.324 ccw(c-2.101,24.324) v1@-2.495,23.929 ; -2.658,24.324 ccw(c-2.101,24.324) v1@-2.495,23.929 ; v1@66.32,40.821 cw(c65.926,40.426) 66.483,40.426 ; v1@66.32,40.821 cw(c65.926,40.426) 66.483,40.426 ; v1@66.32,40.821 cw(c65.926,40.426) 66.483,40.426 ; v1@66.82,23.996 cw(c66.426,23.601) 66.983,23.601 ; v1@66.82,23.996 cw(c66.426,23.601) 66.983,23.601 ; v1@66.82,23.996 cw(c66.426,23.601) 66.983,23.601 ; v1(66.85,36.025) cw(c67.141,35.734) 67.255,36.13 ; v1(66.85,36.025) cw(c67.141,35.734) 67.255,36.13 ; v1(66.85,36.025) cw(c67.141,35.734) 67.255,36.13 ; v1@66.85,36.173 ccw(c66.85,36.53) 67.103,36.278 ; v1@66.85,36.173 ccw(c66.85,36.53) 67.103,36.278 ; v1@66.85,36.173 ccw(c66.85,36.53) 67.103,36.278 ; v1@66.927,36.135 ccw(c66.934,36.552) 67.224,36.252 ; v1@66.927,36.135 ccw(c66.934,36.552) 67.224,36.252 ; v1@66.927,36.135 ccw(c66.934,36.552) 67.224,36.252 ; v1@66.956,36.023 cw(c67.168,35.901) 67.25,36.131 ; v1@66.956,36.023 cw(c67.168,35.901) 67.25,36.131 ; v1@66.956,36.023 cw(c67.168,35.901) 67.25,36.131 ; v1@66.998,36.025 cw(c67.355,36.025) 67.103,36.278 ; v1@66.998,36.025 cw(c67.355,36.025) 67.103,36.278 ; v1@66.998,36.025 cw(c67.355,36.025) 67.103,36.278 ; v1(67.35,19.2) cw(c67.641,18.909) 67.755,19.305 ; v1(67.35,19.2) cw(c67.641,18.909) 67.755,19.305 ; v1(67.35,19.2) cw(c67.641,18.909) 67.755,19.305 ; v1@67.35,19.348 ccw(c67.35,19.705) 67.603,19.453 ; v1@67.35,19.348 ccw(c67.35,19.705) 67.603,19.453 ; v1@67.35,19.348 ccw(c67.35,19.705) 67.603,19.453 ; v1@67.4,35.598 ccw(c67.4,35.895) 67.61,35.685 ; v1@67.4,35.598 ccw(c67.4,35.895) 67.61,35.685 ; v1@67.4,35.598 ccw(c67.4,35.895) 67.61,35.685 ; v1@67.427,19.31 ccw(c67.434,19.727) 67.724,19.427 ; v1@67.427,19.31 ccw(c67.434,19.727) 67.724,19.427 ; v1@67.427,19.31 ccw(c67.434,19.727) 67.724,19.427 ; v1@67.456,19.198 cw(c67.668,19.076) 67.75,19.306 ; v1@67.456,19.198 cw(c67.668,19.076) 67.75,19.306 ; v1@67.456,19.198 cw(c67.668,19.076) 67.75,19.306 ; v1@67.498,19.2 cw(c67.855,19.2) 67.603,19.453 ; v1@67.498,19.2 cw(c67.855,19.2) 67.603,19.453 ; v1@67.498,19.2 cw(c67.855,19.2) 67.603,19.453 ; v1@67.548,35.45 cw(c67.966,35.45) 67.67,35.745 ; v1@67.548,35.45 cw(c67.966,35.45) 67.67,35.745 ; v1@67.548,35.45 cw(c67.966,35.45) 67.67,35.745 ; 67.562,40.988 cw(c67.224,40.65) v1@67.702,40.65 ; 67.562,40.988 cw(c67.224,40.65) v1@67.702,40.65 ; 67.562,40.988 cw(c67.224,40.65) v1@67.702,40.65 ; v1@67.605,39.745 cw(c67.857,39.493) 67.857,39.85 ; v1@67.605,39.745 cw(c67.857,39.493) 67.857,39.85 ; v1@67.605,39.745 cw(c67.857,39.493) 67.857,39.85 ; v1@67.605,39.955 ccw(c67.857,40.207) 67.857,39.85 ; v1@67.605,39.955 ccw(c67.857,40.207) 67.857,39.85 ; v1@67.605,39.955 ccw(c67.857,40.207) 67.857,39.85 ; 67.659,35.734 ccw(c67.193,36.2) 67.852,36.2 ; 67.659,35.734 ccw(c67.193,36.2) 67.852,36.2 ; 67.659,35.734 ccw(c67.193,36.2) 67.852,36.2 ; 67.767,35.884 cw(c68.17,35.776) 67.962,36.137 ; 67.767,35.884 cw(c68.17,35.776) 67.962,36.137 ; 67.767,35.884 cw(c68.17,35.776) 67.962,36.137 ; v1@67.77,44.895 cw(c67.518,44.643) 67.875,44.643 ; v1@67.77,44.895 cw(c67.518,44.643) 67.875,44.643 ; v1@67.77,44.895 cw(c67.518,44.643) 67.875,44.643 ; 67.875,44.643 cw(c68.232,44.643) v1@67.98,44.895 ; 67.875,44.643 cw(c68.232,44.643) v1@67.98,44.895 ; 67.875,44.643 cw(c68.232,44.643) v1@67.98,44.895 ; v1@67.9,18.773 ccw(c67.9,19.07) 68.11,18.86 ; v1@67.9,18.773 ccw(c67.9,19.07) 68.11,18.86 ; v1@67.9,18.773 ccw(c67.9,19.07) 68.11,18.86 ; v1@68.048,18.625 cw(c68.466,18.625) 68.17,18.92 ; v1@68.048,18.625 cw(c68.466,18.625) 68.17,18.92 ; v1@68.048,18.625 cw(c68.466,18.625) 68.17,18.92 ; 68.062,24.163 cw(c67.724,23.825) v1@68.202,23.825 ; 68.062,24.163 cw(c67.724,23.825) v1@68.202,23.825 ; 68.062,24.163 cw(c67.724,23.825) v1@68.202,23.825 ; v1@68.105,22.92 cw(c68.357,22.668) 68.357,23.025 ; v1@68.105,22.92 cw(c68.357,22.668) 68.357,23.025 ; v1@68.105,22.92 cw(c68.357,22.668) 68.357,23.025 ; v1@68.105,23.13 ccw(c68.357,23.382) 68.357,23.025 ; v1@68.105,23.13 ccw(c68.357,23.382) 68.357,23.025 ; v1@68.105,23.13 ccw(c68.357,23.382) 68.357,23.025 ; 68.159,18.909 ccw(c67.693,19.375) 68.352,19.375 ; 68.159,18.909 ccw(c67.693,19.375) 68.352,19.375 ; 68.159,18.909 ccw(c67.693,19.375) 68.352,19.375 ; 68.267,19.059 cw(c68.67,18.951) 68.462,19.312 ; 68.267,19.059 cw(c68.67,18.951) 68.462,19.312 ; 68.267,19.059 cw(c68.67,18.951) 68.462,19.312 ; v1@68.27,28.07 cw(c68.018,27.818) 68.375,27.818 ; v1@68.27,28.07 cw(c68.018,27.818) 68.375,27.818 ; v1@68.27,28.07 cw(c68.018,27.818) 68.375,27.818 ; 68.375,27.818 cw(c68.732,27.818) v1@68.48,28.07 ; 68.375,27.818 cw(c68.732,27.818) v1@68.48,28.07 ; 68.375,27.818 cw(c68.732,27.818) v1@68.48,28.07 ; 70.475,44.227 cw(c70.475,43.327) 71.112,43.963 ; 70.475,44.227 cw(c70.475,43.327) 71.112,43.963 ; 70.475,44.227 cw(c70.475,43.327) 71.112,43.963 ; 70.848,44.6 ccw(c71.748,44.6) 71.112,43.963 ; 70.848,44.6 ccw(c71.748,44.6) 71.112,43.963 ; 70.848,44.6 ccw(c71.748,44.6) 71.112,43.963 ; 70.975,27.402 cw(c70.975,26.502) 71.612,27.138 ; 70.975,27.402 cw(c70.975,26.502) 71.612,27.138 ; 70.975,27.402 cw(c70.975,26.502) 71.612,27.138 ; 71.348,27.775 ccw(c72.248,27.775) 71.612,27.138 ; 71.348,27.775 ccw(c72.248,27.775) 71.612,27.138 ; 71.348,27.775 ccw(c72.248,27.775) 71.612,27.138 ; 71.713,34.812 ccw(c71.443,35.082) 71.825,35.082 ; 71.713,34.812 ccw(c71.443,35.082) 71.825,35.082 ; 71.713,34.812 ccw(c71.443,35.082) 71.825,35.082 ; 72.213,17.987 ccw(c71.943,18.257) 72.325,18.257 ; 72.213,17.987 ccw(c71.943,18.257) 72.325,18.257 ; 72.213,17.987 ccw(c71.943,18.257) 72.325,18.257 ; 72.285,44.392 cw(c72.675,44.13) 72.675,44.6 ; 72.285,44.392 cw(c72.675,44.13) 72.675,44.6 ; 72.285,44.392 cw(c72.675,44.13) 72.675,44.6 ; 72.285,44.808 ccw(c72.675,45.07) 72.675,44.6 ; 72.285,44.808 ccw(c72.675,45.07) 72.675,44.6 ; 72.285,44.808 ccw(c72.675,45.07) 72.675,44.6 ; 72.475,35.525 ccw(c72.895,35.945) v1@73.039,35.369 ; 72.475,35.525 ccw(c72.895,35.945) v1@73.039,35.369 ; 72.475,35.525 ccw(c72.895,35.945) v1@73.039,35.369 ; 72.475,35.525 72.721,35.279 ; 72.721,35.279 cw(c72.721,35.016) v1@72.948,35.15 ; 72.721,35.279 cw(c72.721,35.016) v1@72.948,35.15 ; 72.721,35.279 cw(c72.721,35.016) v1@72.948,35.15 ; 72.785,27.567 cw(c73.175,27.305) 73.175,27.775 ; 72.785,27.567 cw(c73.175,27.305) 73.175,27.775 ; 72.785,27.567 cw(c73.175,27.305) 73.175,27.775 ; 72.785,27.983 ccw(c73.175,28.245) 73.175,27.775 ; 72.785,27.983 ccw(c73.175,28.245) 73.175,27.775 ; 72.785,27.983 ccw(c73.175,28.245) 73.175,27.775 ; 72.792,35.208 ccw(c73.022,35.437) v1@73.101,35.122 ; 72.792,35.208 ccw(c73.022,35.437) v1@73.101,35.122 ; 72.792,35.208 ccw(c73.022,35.437) v1@73.101,35.122 ; 72.975,18.7 ccw(c73.395,19.12) v1@73.539,18.544 ; 72.975,18.7 ccw(c73.395,19.12) v1@73.539,18.544 ; 72.975,18.7 ccw(c73.395,19.12) v1@73.539,18.544 ; 72.975,18.7 73.221,18.454 ; 73.045,43.27 ccw(c73.495,43.27) 73.177,42.952 ; 73.045,43.27 ccw(c73.495,43.27) 73.177,42.952 ; 73.045,43.27 ccw(c73.495,43.27) 73.177,42.952 ; 73.068,42.945 ccw(c72.947,43.041) 73.081,43.118 ; 73.068,42.945 ccw(c72.947,43.041) 73.081,43.118 ; 73.068,42.945 ccw(c72.947,43.041) 73.081,43.118 ; 73.221,18.454 cw(c73.221,18.191) v1@73.448,18.325 ; 73.221,18.454 cw(c73.221,18.191) v1@73.448,18.325 ; 73.221,18.454 cw(c73.221,18.191) v1@73.448,18.325 ; 73.292,18.383 ccw(c73.522,18.612) v1@73.601,18.297 ; 73.292,18.383 ccw(c73.522,18.612) v1@73.601,18.297 ; 73.292,18.383 ccw(c73.522,18.612) v1@73.601,18.297 ; 73.545,26.445 ccw(c73.995,26.445) 73.677,26.127 ; 73.545,26.445 ccw(c73.995,26.445) 73.677,26.127 ; 73.545,26.445 ccw(c73.995,26.445) 73.677,26.127 ; 73.568,26.12 ccw(c73.447,26.216) 73.581,26.293 ; 73.568,26.12 ccw(c73.447,26.216) 73.581,26.293 ; 73.568,26.12 ccw(c73.447,26.216) 73.581,26.293
  Bottom Layer w0.381: -10.25,42.625 -9.925,42.625 -9.25,41.95 -9.25,39.75 ; -8.35,25.2 -8.025,25.2 -7.35,24.525 -7.35,22.325 ; 71.175,42.425 71.175,40.225 71.85,39.55 72.175,39.55 ; 71.675,25.6 71.675,23.4 72.35,22.725 72.675,22.725 ; -10.25,42.416 cw(c-10.25,41.125) -9.338,42.038 ccw(c-10.25,41.125) -10.25,42.416 ; -8.35,24.991 cw(c-8.35,23.7) -7.438,24.613 ccw(c-8.35,23.7) -8.35,24.991 ; 71.263,40.137 ccw(c72.175,41.05) 72.175,39.76 cw(c72.175,41.05) 71.263,40.137 ; 71.763,23.312 ccw(c72.675,24.225) 72.675,22.935 cw(c72.675,24.225) 71.763,23.312